# Altium PCB Sensor_Box_CAN_Switch_STM.PCBDOC
Units mil, origin at the board's own origin, x right, y up, seen from the top; angles counter-clockwise.
Board outline 1496.06 x 1407.48 mil, 2 copper layers (Top, Bot), stack 61.855 mil thick; 65 components, 48 nets, 230 pads, 95 vias.
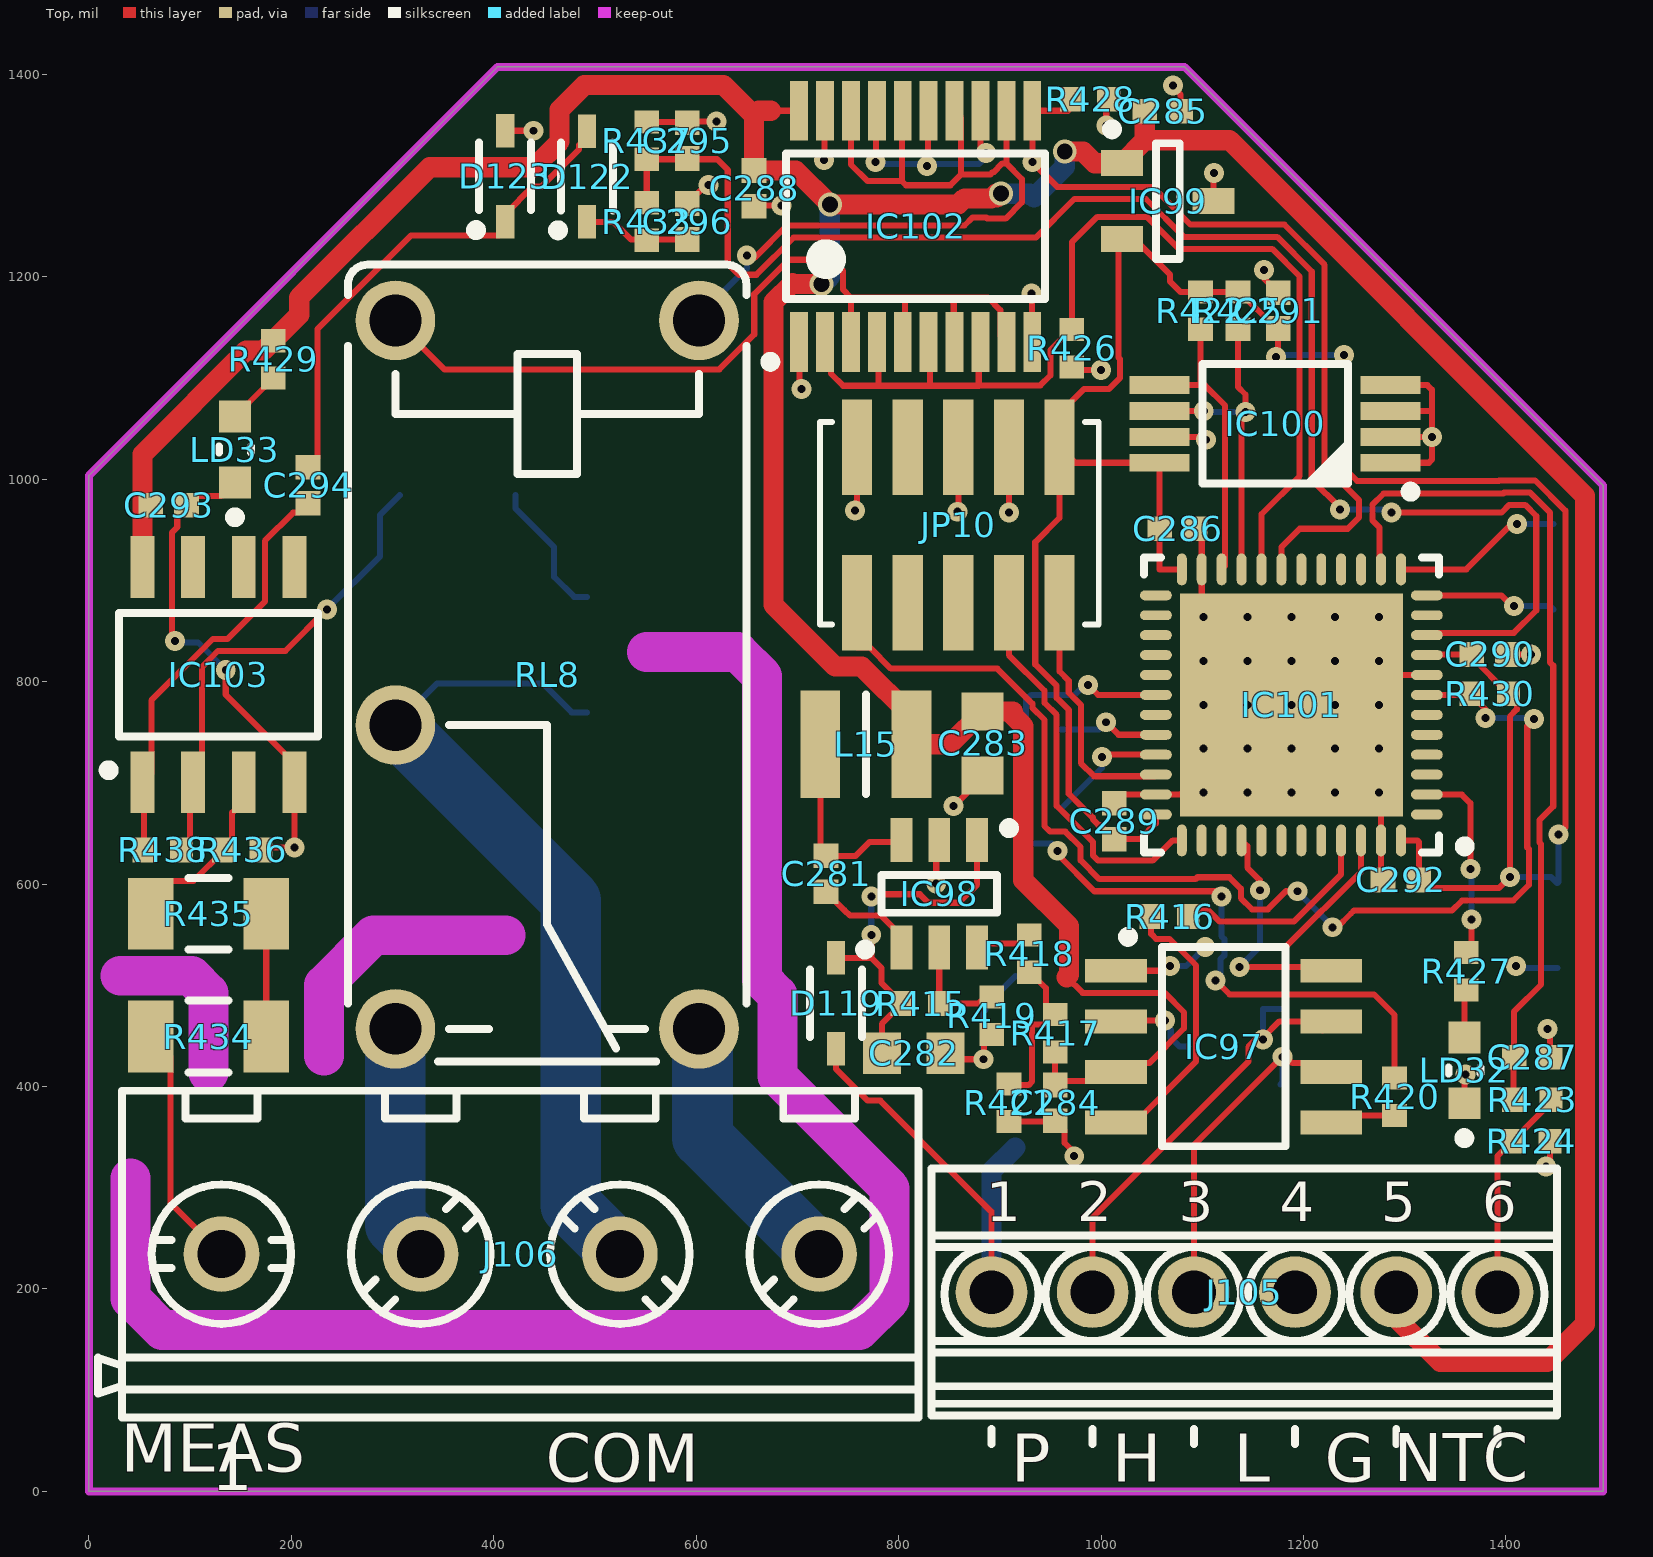
[diagram p0: Top view]
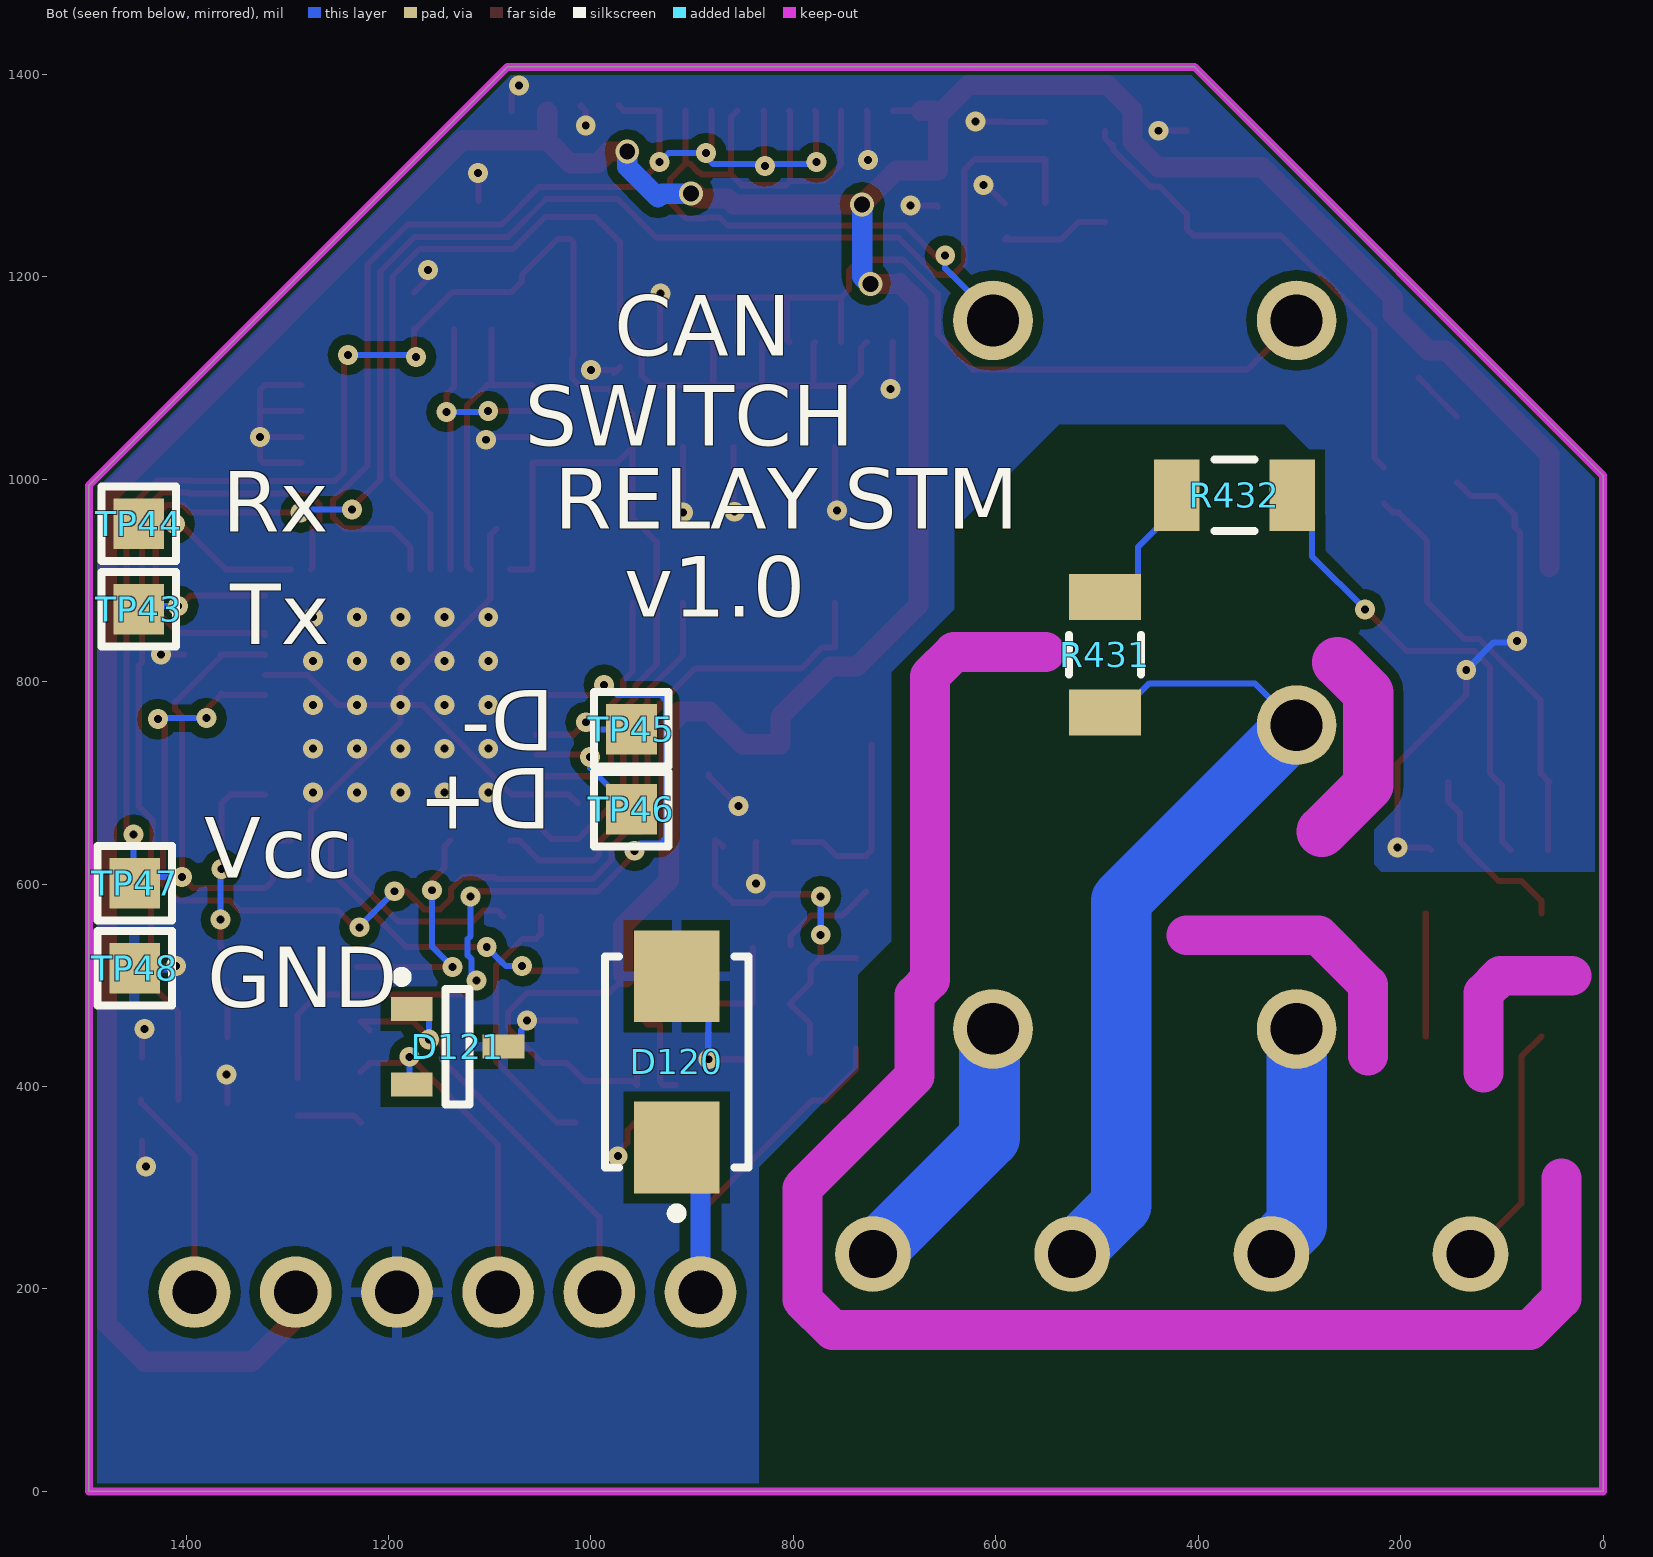
[diagram p1: Bot view, seen from below]
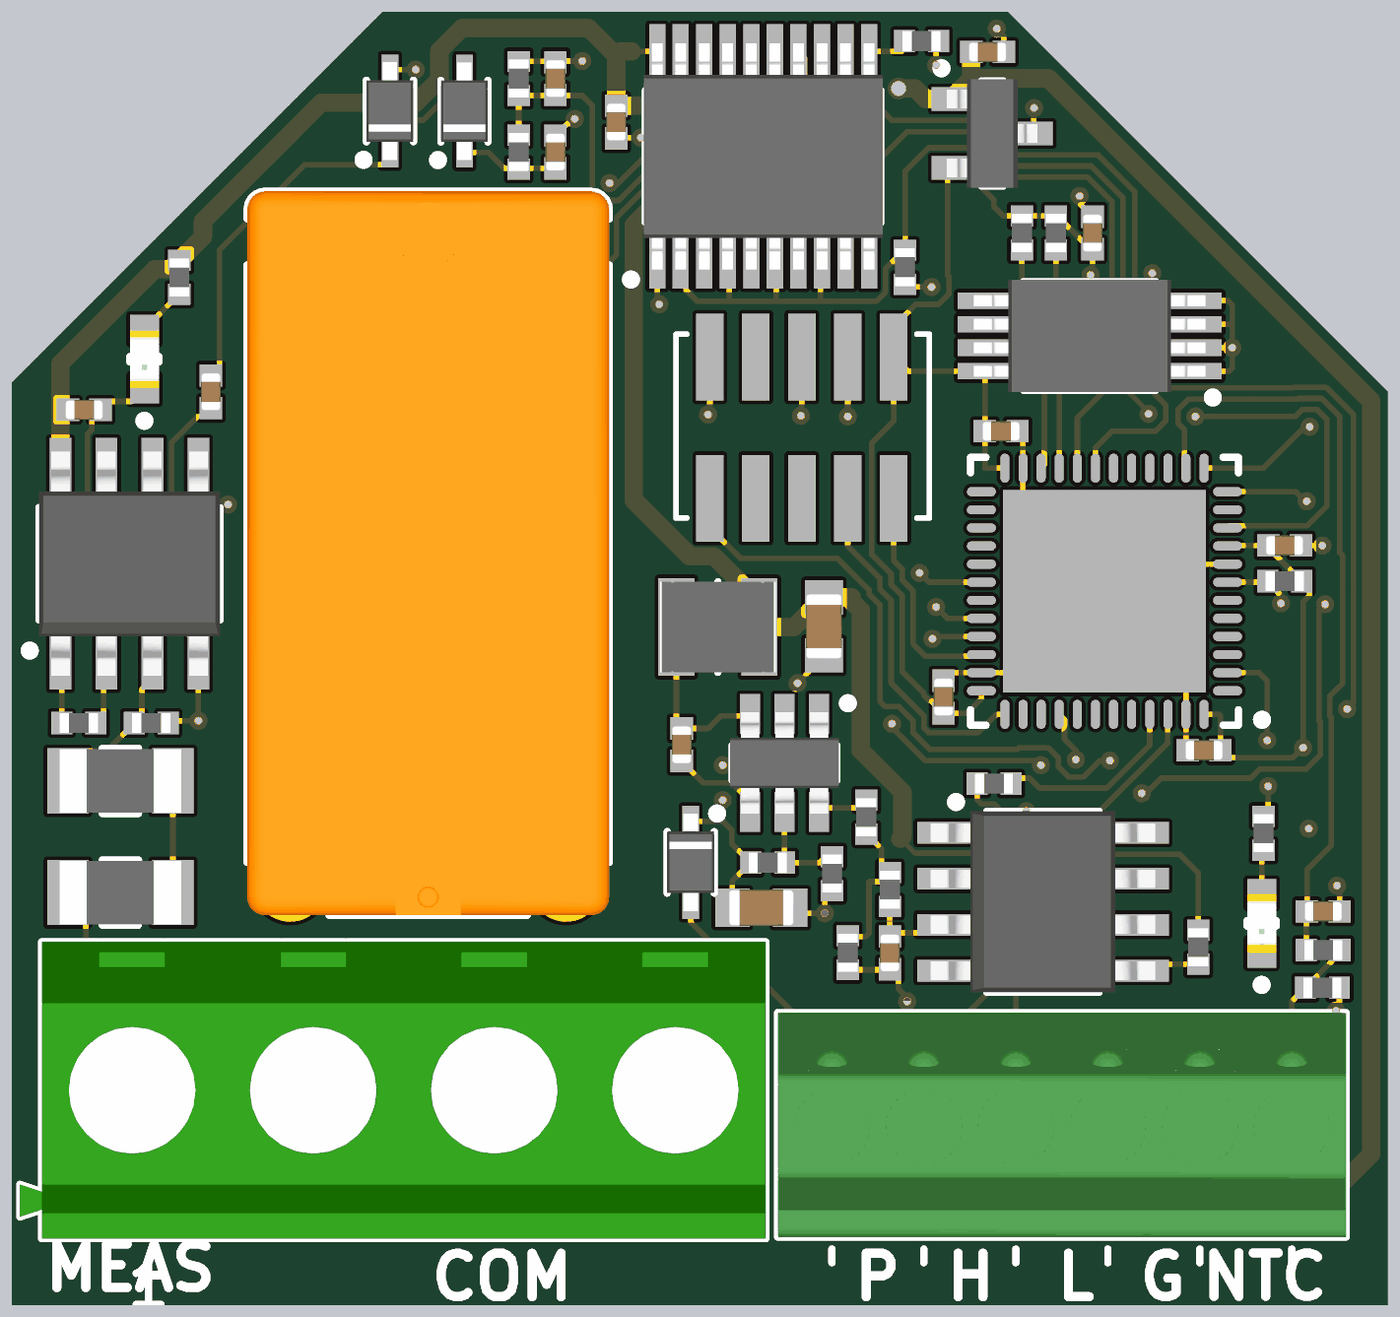
[diagram p2: 3D render of the assembled board from above, using the file's embedded part models]
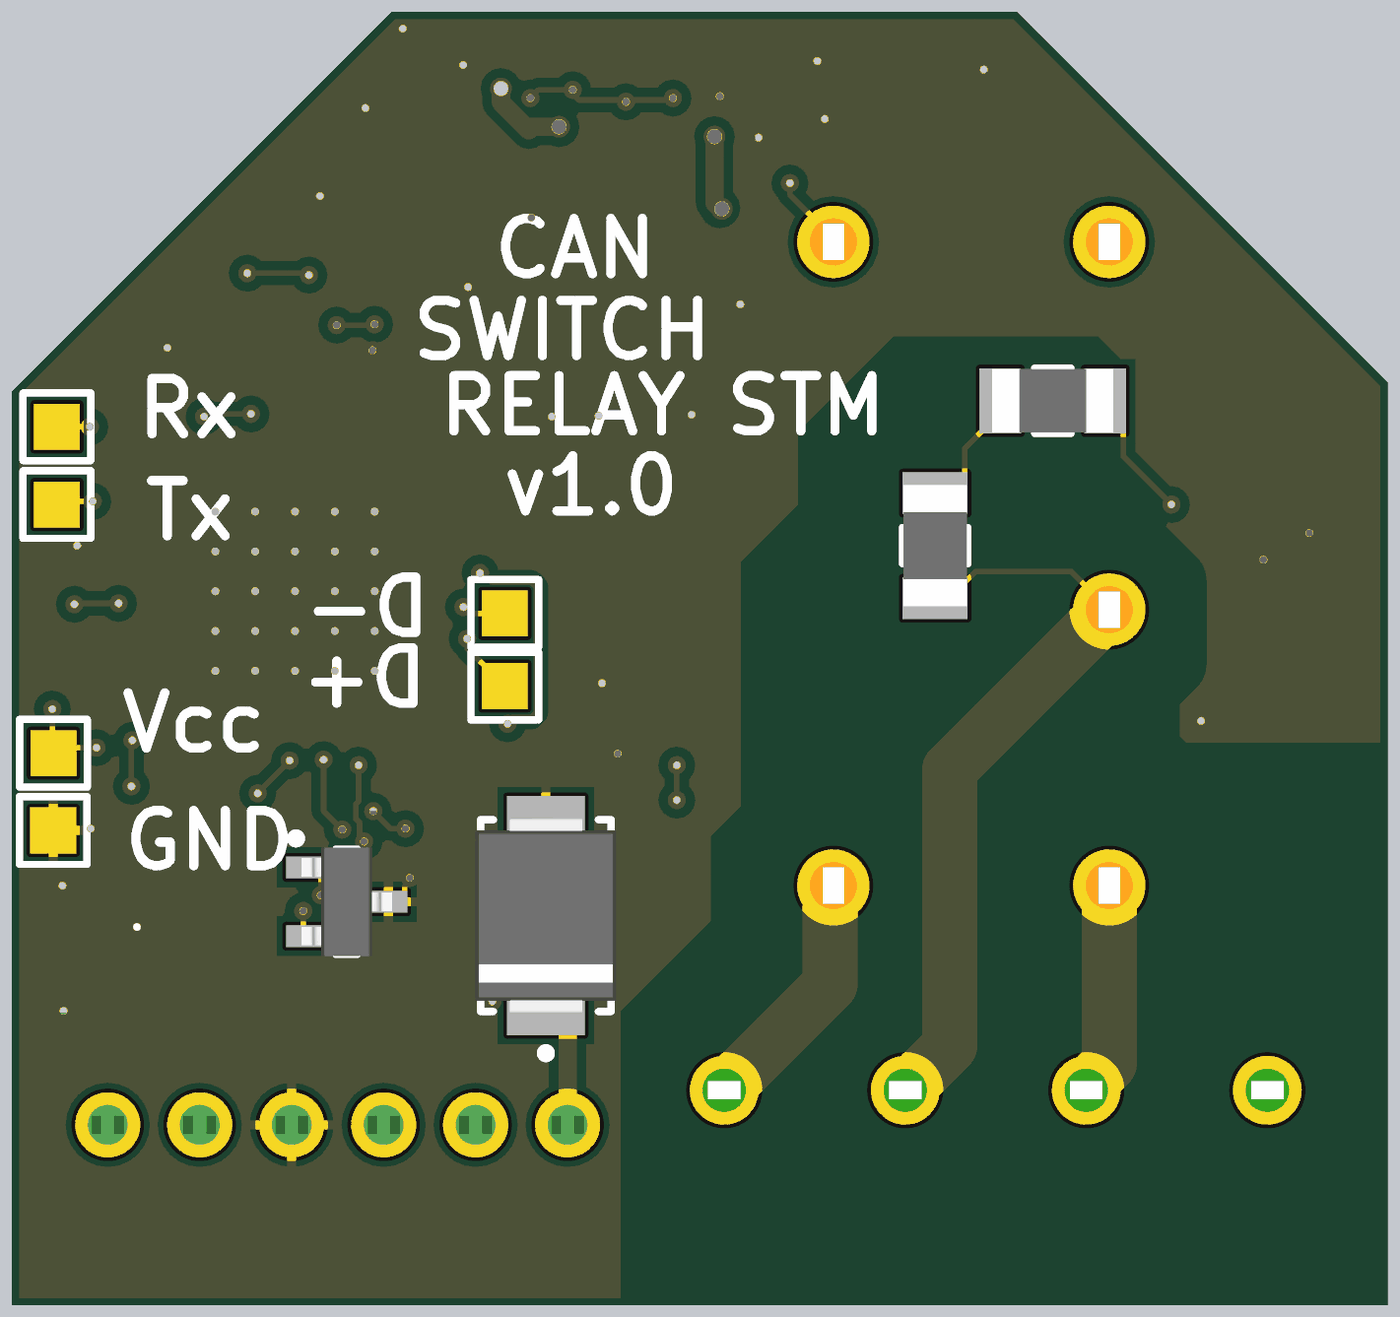
[diagram p3: 3D render of the assembled board from below, using the file's embedded part models]

## Layer stack, top to bottom
TopSolder: solder mask 0.4, Solder Resist, Dk 3.5
Top: signal copper 1.4
Dielectric1: core 59.0551, FR-4, Dk 4.8
Bot: signal copper 1.4
BottomSolder: solder mask 0.4, Solder Resist, Dk 3.5

## Board outline
0,0 0,1003.94 19.68,1023.62 403.54,1407.48 1082.68,1407.48 1496.06,994.09 1496.06,0

## Design rules (kind name [scope] priority, off if disabled: settings)
AcuteAngle [All] p1: minimum=6.00000000000000E+0001 checktracksonly=FALSE
Clearance keepout [All vs OnLayer('KeepOutLayer')] p1: gap=3.94 ignorepadtopadclearanceinfootprint=FALSE
Clearance [All] p2: gap=6 ignorepadtopadclearanceinfootprint=FALSE except(10: Arc-Poly Track-Poly SMDPad-Poly THPad-Poly Via-Poly Fill-Poly Poly-Poly)
DiffPairsRouting [All] p1: maxlimit=20 minlimit=15 mostfreqgap=17 toplayer_minwidth=15 toplayer_maxwidth=15 toplayer_prefwidth=15 bottomlayer_minwidth=15 bottomlayer_maxwidth=15 bottomlayer_prefwidth=15 maxuncoupledlength=500
HoleSize [All] p1: absolutevalues=TRUE maxlimit=200 minlimit=1 maxpercent=80.000 minpercent=20.000
MinimumSolderMaskSliver [All] p1: minsoldermaskwidth=0
MinimumSolderMaskSliver SilkscreenOverComponentPads [All] p2: minsoldermaskwidth=0
PlaneClearance [All] p1: clearance=8
PlaneConnect PlaneConnect_pad [(InPadClass('All Pads'))] p1: planeconnectstyle=Relief reliefexpansion=20 reliefentries=4 reliefconductorwidth=10 reliefairgap=10
PlaneConnect [All] p2: planeconnectstyle=Direct reliefexpansion=20 reliefentries=4 reliefconductorwidth=10 reliefairgap=10
PolygonConnect PolygonConnect_pad [(InPadClass('All Pads'))] p1: connectstyle=Relief reliefconductorwidth=10 reliefentries=4 polygonreliefangle="90 Angle" airgapwidth=10
PolygonConnect [All] p2: connectstyle=Direct reliefconductorwidth=10 reliefentries=4 polygonreliefangle="90 Angle" airgapwidth=10
RoomDefinition Sensor_Box_CAN_Switch_STM [InComponentClass('Sensor_Box_CAN_Switch_STM')] p1 off: confinementstyle=ConfineIn formatcopy=TRUE lockcomponents=FALSE outline 1344.47,-2041.35 8539.34,-2041.35 8539.34,-1106.31 1344.47,-1106.31
RoutingVias [All] p1: holewidth=7.87 width=19.68 viastyle="Through Hole" minholewidth=7.87 minwidth=19.68 maxholewidth=19.68 maxwidth=39.37
SilkToSilkClearance [All] p1: silktosilkclearance=0
SilkToSolderMaskClearance [IsPad] p1: minsilkscreentomaskgap=0 clearancetoexposedcopper=TRUE
SolderMaskExpansion [All] p1: expansion=4
ViasUnderSMD ViasUnderSMD_allow [InComponent('IC18') or InComponent('IC10') or InComponent('IC13') or InComponent('IC14') or InComponent('IC15')] p1: allowed=TRUE
ViasUnderSMD [All] p2: allowed=FALSE
Width Width_1 [(InDifferentialPairClass('All Differential Pairs'))] p1: maxlimit=8 minlimit=8 preferedwidth=8
Width [All] p2: maxlimit=100 minlimit=6 preferedwidth=6
23 further rules are at their usual default settings.

## Components (designator, comment, footprint, x,y, rotation, side; value= is the part's Value field where it differs from the comment)
C281 "1uF" CAPC1005X55N 728.35,610.24 r90 top
C282 "22uF" CAPC1709X100N 815,433 r180 top
C283 "22uF" CAPC1709X100N 883,739 r90 top
C284 "100nF" CAPC1005X55N 954.72,383.86 r90 top
C285 "1uF" CAPC1005X55N 1061,1363.58 r180 top
C286 "1uF" CAPC1005X55N 1075.72,951.14 r180 top
C287 "100nF" CAPC1005X55N 1426,429 r180 top
C288 "1uF" CAPC1005X55N 657.18,1287.45 r270 top
C289 "100nF" CAPC1005X55N 1013.1,662.14 r270 top
C290 "100nF" CAPC1005X55N 1384,827 r180 top
C291 "100nF" CAPC1005X55N 1175.05,1166.76 r270 top
C292 "100nF" CAPC1005X55N 1296.37,604.14 r0 top
C293 "1uF" CAPC1005X55N 78.74,974.41 r180 top
C294 "1uF" CAPC1005X55N 216.53,994.09 r90 top
C295 "1uF" CAPC1005X55N 591.18,1334.76 r90 top
C296 "1uF" CAPC1005X55N 591.18,1254.76 r90 top
D119 "1N4148WS" SODFL2512X100N 738.19,482.28 r270 top
D120 "SMBJ15A" DIOM5336X265N 915.35,424.41 r90 bottom
D121 "PESD1CAN-UX" SOT95P237X112-3N 1131.89,439.45 r180 bottom
D122 "1N4148WS" SODFL2512X100N 492.13,1299.21 r90 top
D123 "1N4148WS" SODFL2512X100N 411.18,1299.45 r90 top
IC97 "MCP2551-I/SN" SOIC127P600X175-8N 1121.18,439.45 r0 top
IC98 "AP65111AWU-7" SOT95P280X100-6N 840.18,590.45 r270 top
IC99 "AP7313-33SAG-7" SOT95P240X130-3N 1066,1275 r0 top
IC100 "M24256-BRDW6" SOP65P640X120-8N 1172,1054.76 r180 top
IC101 "STM32F042C6U6" STM-UFQFPN48_L 1188.1,777.14 r180 top
IC102 "SN74HCT244PW" SOP65P640X120-20N 816.93,1250 r90 top
IC103 "LM358AD" SOIC127P600X175-8N 127.95,807.09 r90 top
J105 "=Family" PHOENIX_1725698 1141.73,196.85 r0 top
J106 "=Family" TYCO_282836-4 426.18,234.45 r0 top
JP10 "PLHTD10S-TR-CV" PLHTD10S-TR-CV 734,955 r180 top
L15 "6.8uH" IND_WALSIN_WLPN3030 767.72,738.19 r0 top
LD32 "Green" LED_KINGBRIGHT_KPH-1608CGCK 1359,416 r90 top
LD33 "Green" LED_KINGBRIGHT_KPH-1608CGCK 144.18,1029.45 r90 top
R415 "13k" RESC1005X40N 822,482 r180 top
R416 "1k" RESC1005X40N 1068,568 r0 top
R417 "68k" RESC1005X40N 954.72,452.76 r270 top
R418 "68k" RESC1005X40N 929.18,531.45 r270 top
R419 "13k" RESC1005X40N 892,470 r90 top
R420 "1k" RESC1005X40N 1290,390 r90 top
R421 "13k" RESC1005X40N 909,384 r90 top
R422 "1k" RESC1005X40N 1098.32,1166.76 r90 top
R423 "10k" RESC1005X40N 1426,387 r180 top
R424 "10k" RESC1005X40N 1425,346 r180 top
R425 "1k" RESC1005X40N 1135.32,1166.76 r90 top
R426 "10k" RESC1005X40N 971.18,1129.45 r90 top
R427 "10k" RESC1005X40N 1361,514 r270 top
R428 "10k" RESC1005X40N 989.18,1375.45 r180 top
R429 "10k" RESC1005X40N 182.18,1118.45 r270 top
R430 "10k" RESC1005X40N 1384.1,788.14 r180 top
R431 "1M" RESC3216X65N 492.13,826.77 r90 bottom
R432 "1M" RESC3216X65N 364.17,984.25 r180 bottom
R433 "10k" RESC1005X40N 551.18,1254.76 r90 top
R434 "1M" RESC3216X65N 118.11,449.45 r0 top
R435 "1M" RESC3216X65N 118.11,570.87 r180 top
R436 "10k" RESC1005X40N 151.57,633.86 r0 top
R437 "10k" RESC1005X40N 551.18,1334.76 r270 top
R438 "10k" RESC1005X40N 72.83,633.86 r0 top
RL8 "REL_TYCO_PE01" REL_TYCO_PE01 452.76,807.09 r270 top value=5VDC
TP43 "Test Point" TPS127 1447,871.45 r90 bottom
TP44 "Test Point" TPS127 1447,956 r90 bottom
TP45 "Test Point" TPS127 960,753 r90 bottom
TP46 "Test Point" TPS127 960,674 r90 bottom
TP47 "Test Point" TPS127 1450.79,601 r90 bottom
TP48 "Test Point" TPS127 1451,517 r90 bottom

## Footprints (in the part's own frame and the unit in brackets; to place one, negate y for a bottom-side part, rotate by r counter-clockwise, add the part's x,y. Pads: shape width x height; smd on the part's side, far side on the other; paste and mask are expansions set on the pad)
CAPC1005X55N [mm] "Chip Capacitor, Body 1.0x0.55mm, IPC Medium Density"
  rect 0.62x0.62 smd: 1(-0.45,0) 2(0.45,0)
  body extent -0.52,-0.27 0.53,0.28, height 0.55
CAPC1709X100N [mm] "Capacitor,non-Polarized, Chip;1.65mm L X 0.85mm W X 1.00mm H, IPC Medium Density"
  rect 0.95x1.05 smd: 1(-0.8,0) 2(0.8,0)
  body extent -0.9,-0.5 0.9,0.5, height 1
DIOM5336X265N [mm] "DO-214-AA/SMB Diode, Molded Body; 5.34mm L X 3.625mm W X 2.65mm H, IPC Medium Density"
  rect 2.3x2.15 smd: 1(-2.15,0) 2(2.15,0)
  silkscreen extent -3.92,-1.8 2.65,1.8, body extent -2.7,-1.95 2.7,1.95, height 2.4
IND_WALSIN_WLPN3030 [mm] "Miniature Surface Mount Power Inductors, 3mm L X 3mm W X 1.5mm H"
  rect 1x2.7 smd: 1(-1.145,0) 2(1.145,0)
  silkscreen extent 0,-1.25 0,1.25, body extent -1.6,-1.25 1.6,1.25, height 2.3
LED_KINGBRIGHT_KPH-1608CGCK [mm] "SMT Green LED, Case 0603, Body L 1.6 x W 0.8mm H 0.65mm"
  rect 0.8x0.8 smd: 1(-0.825,0) 2(0.825,0)
  silkscreen extent -1.82,-0.4 0.08,0.4, body extent -0.8,-0.4 0.8,0.4, height 0.65
PHOENIX_1725698 [mm] "Micro PCB Terminal Block, Pitch 2.54mm, 6 Positions, Screw Connection"
  round 1.8 hole 1.1: 1(-6.35,0) 2(-3.81,0) 3(-1.27,0) 4(1.27,0) 5(3.81,0) 6(6.35,0)
  silkscreen extent -7.85,-3.81 7.85,3.1, body extent -7.85,-3.1 7.85,3.1, height 8.5
PLHTD10S-TR-CV [mm] "SMT 1.27 mm dual goldpin"
  rect 0.76x2.4 smd: 1(-5.715,-1.95) 2(-5.715,1.95) 3(-4.445,-1.95) 4(-4.445,1.95) 5(-3.175,-1.95) 6(-3.175,1.95) 7(-1.905,-1.95) 8(-1.905,1.95) 9(-0.635,-1.95) 10(-0.635,1.95)
  silkscreen extent -6.7,-2.58 0.3,2.5, body extent -6.5,-2.15 0.1,2.15, height 4.5
REL_TYCO_PE01 [mm] "1 form C (CO) General Purpose Low Power PCB Relay, PE Series, Body 20mm x 10mm"
  round 2 hole 1.3: 11(1.27,-3.81) 12(8.89,3.81) 14(8.89,-3.81) A1(-8.89,-3.81) A2(-8.89,3.81)
  silkscreen extent -10.29,-5 9.71,5, body extent -10.29,-5 9.71,5, height 10
RESC1005X40N [mm] "Chip Resistor, EIA 0402, Metric 1005, Body 1.0x0.5mm, IPC Medium Density"
  rect 0.58x0.62 smd: 1(-0.47,0) 2(0.47,0)
  body extent -0.52,-0.27 0.53,0.28, height 0.4
RESC3216X65N [mm] "Chip Resistor, EIA 1206, Metric 3216, Body 3.2x1.6mm, IPC Medium Density"
  rect 1.15x1.8 smd: 1(-1.45,0) 2(1.45,0)
  silkscreen extent -0.5,-0.9 0.5,0.9, body extent -1.67,-0.87 1.68,0.88, height 0.65
SODFL2512X100N [mm] "SODFL Diode; 1.70mm W X 1.25mm L X 1.00mm H body, IPC Medium Density"
  rect 0.84x0.46 smd: 1(-1.14,0) 2(1.14,0)
  silkscreen extent -1.47,-0.65 0.85,0.86, body extent -1.35,-0.65 1.35,0.65, height 1
SOIC127P600X175-8N [mm] "SOIC 8, Pitch 1.27mm - Body 4x5mm, IPC Medium Density"
  rect 1.55x0.6 smd: 1(-2.7,1.905) 2(-2.7,0.635) 3(-2.7,-0.635) 4(-2.7,-1.905) 5(2.7,-1.905) 6(2.7,-0.635) 7(2.7,0.635) 8(2.7,1.905)
  silkscreen extent -2.52,-2.5 1.55,2.88, body extent -3.1,-2.5 3.1,2.5, height 1.75
SOP65P640X120-8N [mm] "SOP, 0.65mm pitch; 8 pin, 4.40mm W X 3.00mm L X 1.20mm H body, IPC Medium Density"
  rect 1.5x0.45 smd: 1(-2.9,0.975) 2(-2.9,0.325) 3(-2.9,-0.325) 4(-2.9,-0.975) 5(2.9,-0.975) 6(2.9,-0.325) 7(2.9,0.325) 8(2.9,0.975)
  silkscreen extent -3.53,-1.5 1.83,1.82, body extent -3.2,-1.55 3.2,1.55, height 1.2
SOP65P640X120-20N [mm] "SOP, 20-Leads, Body 6.5x4.4mm, Pitch 0.65mm, IPC Medium Density"
  rect 1.5x0.45 smd: 1(-2.9,2.925) 2(-2.9,2.275) 3(-2.9,1.625) 4(-2.9,0.975) 5(-2.9,0.325) 6(-2.9,-0.325) 7(-2.9,-0.975) 8(-2.9,-1.625) 9(-2.9,-2.275) 10(-2.9,-2.925) 11(2.9,-2.925) 12(2.9,-2.275) 13(2.9,-1.625) 14(2.9,-0.975) 15(2.9,-0.325) 16(2.9,0.325) 17(2.9,0.975) 18(2.9,1.625) 19(2.9,2.275) 20(2.9,2.925)
  silkscreen extent -3.52,-3.25 1.82,3.77, body extent -3.12,-3.3 3.12,3.3, height 1.2
SOT95P237X112-3N [mm] "SOT, 0.95mm, pitch; 3 pin,1.30mm W X 2.92mm L X 1.12mm H body, IPC Medium Density"
  rect 1.05x0.6 smd: 1(-1.15,0.95) 2(-1.15,-0.95) 3(1.15,0)
  silkscreen extent -1.53,-1.45 0.3,1.87, body extent -1.25,-1.5 1.25,1.5, height 1.1
SOT95P240X130-3N [mm] "SOT23 3-Leads, Pitch 0.95mm - Body 1.3x2.9mm, IPC Medium Density"
  rect 1.05x0.65 smd: 1(-1.15,0.95) 2(-1.15,-0.95) 3(1.15,0)
  silkscreen extent -1.52,-1.45 0.3,1.92, body extent -1.25,-1.5 1.25,1.5, height 1.3
SOT95P280X100-6N [mm] "SOT23, 0.95mm pitch; 6 pin, 1.625mm W X 2.90mm L X 1.00mm H body, IPC Medium Density"
  rect 1.1x0.55 smd: 1(-1.35,0.95) 2(-1.35,0) 3(-1.35,-0.95) 4(1.35,-0.95) 5(1.35,0) 6(1.35,0.95)
  silkscreen extent -1.77,-1.45 0.48,1.88, body extent -1.4,-1.5 1.4,1.5, height 1
STM-UFQFPN48_L [mm] "QFN, 48-Leads, Body 7.1x7.1mm, Pitch 0.5mm, Thermal Pad 5.6x5.6mm, IPC High Density"
  oval 0.8x0.25 smd: 1(-3.4,2.75) 2(-3.4,2.25) 3(-3.4,1.75) 4(-3.4,1.25) 5(-3.4,0.75) 6(-3.4,0.25) 7(-3.4,-0.25) 8(-3.4,-0.75) 9(-3.4,-1.25) 10(-3.4,-1.75) 11(-3.4,-2.25) 12(-3.4,-2.75) 25(3.4,-2.75) 26(3.4,-2.25) 27(3.4,-1.75) 28(3.4,-1.25) 29(3.4,-0.75) 30(3.4,-0.25) 31(3.4,0.25) 32(3.4,0.75) 33(3.4,1.25) 34(3.4,1.75) 35(3.4,2.25) 36(3.4,2.75)
  oval 0.25x0.8 smd: 13(-2.75,-3.4) 14(-2.25,-3.4) 15(-1.75,-3.4) 16(-1.25,-3.4) 17(-0.75,-3.4) 18(-0.25,-3.4) 19(0.25,-3.4) 20(0.75,-3.4) 21(1.25,-3.4) 22(1.75,-3.4) 23(2.25,-3.4) 24(2.75,-3.4) 37(2.75,3.4) 38(2.25,3.4) 39(1.75,3.4) 40(1.25,3.4) 41(0.75,3.4) 42(0.25,3.4) 43(-0.25,3.4) 44(-0.75,3.4) 45(-1.25,3.4) 46(-1.75,3.4) 47(-2.25,3.4) 48(-2.75,3.4)
  rect 5.6x5.6 smd: 49(0,0)
  silkscreen extent -4.48,-3.7 3.7,3.7, body extent -3.55,-3.55 3.55,3.55, height 0.6
TPS127 [mil] "1.27 x  1.27mm SMD Test Point Area"
  rect 50x50 smd paste-50: 1(0,0)
  silkscreen extent -37,-37 37,37
TYCO_282836-4 [mm] "15.5A, 300V, Terminal Block, Pitch 5mm, 4 Positions, Screw Connection"
  round 1.9 hole 1.2: 1(-7.5,0) 2(-2.5,0) 3(2.5,0) 4(7.5,0)
  silkscreen extent -10.6,-4.1 10,4.1, body extent -10.6,-4.1 10,4.1, height 10

## Part data
C281 C285 C286 C288 C293 C294 C295 C296: library part CC0402_1UF_16V_10%_X5R, "Non-polarised capacitor", Case=0402, Manufacturer=GENERIC, Manufacturer1 ComponentHeight=0.55mm, Manufacturer1 Example=TDK, Manufacturer1 Part Number=C1005X5R1C105KT, Tolerance=±10%, Voltage=16V, Author="CERN DEM JLC", Component Type=Standard, CreateDate=25.10.2012, HelpURL=\\cern.ch\dfs\Applications\Altium\Datasheets\CC0402_X5R_TDK_C.pdf, LatestRevisionDate=25.10.2012, Manufacturer Part Number=CC0402_1UF_16V_10%_X5R, Mounted=Yes, Part Description="SMD Multilayer Chip Ceramic Capacitor", Part Number=CC0402_1UF_16V_10%_X5R, Pin Count=2, Sense=No, SMD=Yes, Socket=No, Status=Preferred, TC=X5R
C282 C283: library part CC0603_22UF_6.3V_20%_X5R, "Non-polarised capacitor", Case=0603, Manufacturer=GENERIC, Manufacturer1 ComponentHeight=1mm, Manufacturer1 Example=TDK, Manufacturer1 Part Number=C1608X5R0J226M080AC, Tolerance=±20%, Voltage=6.3V, Author="CERN DEM JLC", Component Type=Standard, CreateDate=16.12.2013, HelpURL=\\cern.ch\dfs\Applications\Altium\Datasheets\CC0603_X5R_TDK_C.pdf, LatestRevisionDate=13.09.2016, Manufacturer Part Number=CC0603_22UF_6.3V_20%_X5R, Mounted=Yes, Part Description="SMD Multilayer Chip Ceramic Capacitor", Part Number=CC0603_22UF_6.3V_20%_X5R, Pin Count=2, Sense=No, SMD=Yes, Socket=No, Status=None, TC=X5R
C284 C287 C289 C290 C291 C292: library part CC0402_100NF_16V_10%_X5R, "Non-polarised capacitor", Case=0402, Manufacturer=GENERIC, Manufacturer1 ComponentHeight=0.55mm, Manufacturer1 Example=MURATA, Manufacturer1 Part Number=GRM155R61C104KA88D, Tolerance=±10%, Voltage=16V, Author="CERN DEM JLC", Component Type=Standard, CreateDate=10.12.2013, HelpURL=\\cern.ch\dfs\Applications\Altium\Datasheets\CC0402_X5R_MURATA_GRM.pdf, LatestRevisionDate=10.12.2013, Manufacturer Part Number=CC0402_100NF_16V_10%_X5R, Mounted=Yes, Part Description="SMD Multilayer Chip Ceramic Capacitor", Part Number=CC0402_100NF_16V_10%_X5R, Pin Count=2, Sense=No, SMD=Yes, Socket=No, Status=None, TC=X5R
D119 D122 D123: "Diode", Case=SOD-323F, Manufacturer="FAIRCHILD SEMICONDUCTOR", Power=150mA, Voltage=75V, Author="CERN DEM JLC", Bonding=No, ComponentHeight=1mm, Component Type=Standard, CreateDate=12.05.2011, Device=1N4148WS, HelpURL=\\cern.ch\dfs\Applications\Altium\Datasheets\1N4148WS.pdf, LatestRevisionDate=12.05.2011, Manufacturer Part Number=1N4148WS, Mounted=Yes, PackageDescription="SODFL Diode; 1.70mm W X 1.25mm L X 1.00mm H body, IPC Medium Density", Part Description="Small Signal Diodes", Part Number=1N4148WS, Pin Count=2, PressFit=No, Sense=No, SMD=Yes, Socket=No
D120: "Zener Diode", Case=DO-214AA, Manufacturer="FAIRCHILD SEMICONDUCTOR", Power=600W, Voltage=15V, Author="CERN DEM JLC", Bonding=No, ComponentHeight=2.65mm, Component Type=Standard, CreateDate=08.12.2008, Device=SMBJ15A, HelpURL=\\cern.ch\dfs\Applications\Altium\Datasheets\SMBJ.pdf, LatestRevisionDate=19.12.2011, Manufacturer Part Number=SMBJ15A, Mounted=Yes, PackageDescription="DO-214-AA/SMB Diode, Molded Body; 5.34mm L X 3.625mm W X 2.65mm H, IPC Medium Density", Part Description="Uni-Directional Transient Voltage Suppressor Diode", Part Number=SMBJ15A, Pin Count=2, PressFit=No, Sense=No, SMD=Yes, Socket=No
D121: "TVS Diode for CAN", Case=SOT-23, Manufacturer=Nexperia, Power=400W, Voltage=24V, Author="CERN DEM JLC", Bonding=No, ComponentHeight=1.12mm, Component Type=Standard, CreateDate=03.09.2014, Device=PESD1CAN-UX, HelpURL=\\cern.ch\dfs\Applications\Altium\Datasheets\SM712.TCT.pdf, LatestRevisionDate=13.01.2015, Manufacturer Part Number=PESD1CAN-UX, Mounted=Yes, PackageDescription="SOT, 0.95mm, pitch; 3 pin,1.30mm W X 2.92mm L X 1.12mm H body, IPC Medium Density", Part Description="TVS Diode for CAN", Part Number=PESD1CAN-UX, Pin Count=3, PressFit=No, Sense=No, SMD=Yes, Socket=No
IC97: "High-Speed CAN Transceiver, 8-Pin SOIC, Industrial Temperature", Case=SOIC8, Manufacturer="MICROCHIP TECHNOLOGY", Author=GK, Bonding=No, ComponentHeight=1.75mm, Component Type=Standard, CreateDate=07.09.2016, Device=MCP2551-I/SN, LatestRevisionDate=07.09.2016, Manufacturer Part Number=MCP2551-I/SN, Mounted=Yes, PackageDescription="SOIC 8, Pitch 1.27mm - Body 4x5mm, IPC Medium Density", Part Description="High-Speed CAN Transceiver", Part Number=MCP2551-I/SN, Pin Count=8, PressFit=No, Sense=No, SMD=Yes, Socket=No
IC98: "Light Load Improved 1.5A Synch DC/DC Buck Converter", Case=SOT23-6, Manufacturer="DIODES INCORPORATED", Author="CERN DEM JLC", Bonding=No, ComponentHeight=1.1mm, Component Type=Standard, CreateDate=20.03.2018, Device=AP65111AWU-7, HelpURL=\\cern.ch\dfs\Applications\Altium\Datasheets\AP65111AWU-7.pdf, LatestRevisionDate=20.03.2018, Manufacturer Part Number=AP65111AWU-7, Mounted=Yes, PackageDescription="SOT23, 0.95mm pitch; 6 pin, 1.625mm W X 2.90mm L X 1.00mm H body, IPC Medium Density", Part Description="Light Load Improved 1.5A Synch DC/DC Buck Converter", Part Number=AP65111AWU-7, Pin Count=6, PressFit=No, Sense=No, SMD=Yes, Socket=No
IC99: "3-Terminal Regulator 1=IN 2=OUT 3=GND", Case=SOT23, Manufacturer="DIODES INCORPORATED", Author="CERN DEM JLC", Bonding=No, ComponentHeight=1.35mm, Component Type=Standard, CreateDate=20.03.2018, Device=AP7313-33SAG-7, HelpURL=\\cern.ch\dfs\Applications\Altium\Datasheets\AP7313-33SAG-7.pdf, LatestRevisionDate=20.03.2018, Manufacturer Part Number=AP7313-33SAG-7, Mounted=Yes, PackageDescription="SOT23 3-Leads, Pitch 0.95mm - Body 1.3x2.9mm, IPC Medium Density", Part Description="3.3V, 150mA Low Quiescent Current, Fast Transient Low Dropout Linear Regulator", Part Number=AP7313-33SAG-7, Pin Count=3, PressFit=No, Sense=No, SMD=Yes, Socket=No
IC100: "256-Kbit Serial I²C Bus EEPROM", Case=TSSOP8, Manufacturer="ST MICROELECTRONICS", Part Number=M24256-BRDW6P, Author="CERN DEM MR", Bonding=No, ComponentHeight=1.2mm, Component Type=Standard, CreateDate=17.03.2016, Device=M24256-BRDW6, HelpURL=\\cern.ch\dfs\Applications\Altium\Datasheets\M24256-BRDW6P.pdf, LatestRevisionDate=17.03.2016, Manufacturer Part Number=M24256-BRDW6, Mounted=Yes, PackageDescription="SOP, 0.65mm pitch; 8 pin, 4.40mm W X 3.00mm L X 1.20mm H body, IPC Medium Density", Part Description="256-Kbit Serial I²C Bus EEPROM", Pin Count=8, PressFit=No, Sense=No, SMD=Yes, Socket=No
IC101: library part CMP-0304-00104-1, "ARM Cortex-M0 32-bit MCU, 32 KB Flash, 6 KB Internal RAM, 38 I/Os, 48-Pin UFQFPN, -40 to 85 degC, Tray", I/Os (High Current)=38, Operating Frequency(F) (Processor speed) (MHz)=48, Package Description="48-Pin Ultra Thin Fine Pitch Quad Flat No-Lead, 7 x 7 x 0.6 mm Body, 0.5 mm Pitch, Exposed Pad", Package Reference=UFQFPN48, Supply Voltage(Vcc) min (V)=2, ComponentLink1Description="Manufacturer URL", ComponentLink1URL=http://www.st.com/, ComponentLink2Description=Datasheet, ComponentLink2URL=http://www.st.com/st-web-ui/static/active/en/resource/technical/document/datasheet/DM00105814.pdf, Core="ARM Cortex-M0", DatasheetVersion="Rev. 5", FLASH Size (Prog) (kB)=32, Internal RAM Size (kB)=6, Mounting Technology="Surface Mount", Packing=Tray
IC102: "Octal Buffer/Driver with 3-State Ouputs", Case=TSSOP20, Manufacturer="TEXAS INSTRUMENTS", Author="CERN DEM JLC", Bonding=No, ComponentHeight=1.2mm, Component Type=Standard, CreateDate=11.10.2011, Device=SN74HCT244PW, HelpURL=\\cern.ch\dfs\Applications\Altium\Datasheets\SN74HCT244PW.pdf, LatestRevisionDate=11.10.2011, Manufacturer Part Number=SN74HCT244PW, Mounted=Yes, PackageDescription="SOP, 20-Leads, Body 6.5x4.4mm, Pitch 0.65mm, IPC Medium Density", Part Description="Octal Buffer And Line Driver with 3-State Ouputs", Part Number=SN74HCT244PW, Pin Count=20, PressFit=No, Sense=No, SMD=Yes, Socket=No
IC103: "Dual Operational Amplifier", Case=SOIC8, Manufacturer="TEXAS INSTRUMENTS", Author="CERN DEM JLC", Bonding=No, ComponentHeight=1.75mm, Component Type=Standard, CreateDate=02.12.2008, Device=LM358AD, HelpURL=\\cern.ch\dfs\Applications\Altium\Datasheets\LM358AD.pdf, LatestRevisionDate=13.04.2010, Manufacturer Part Number=LM358AD, Mounted=Yes, PackageDescription="SOIC 8, Pitch 1.27mm - Body 4x5mm, IPC Medium Density", Part Description="Dual Operational Amplifier", Part Number=LM358AD, Pin Count=8, PressFit=No, Sense=No, SMD=Yes, Socket=No
J105: library part PHOENIX_1725698, "Terminal Block, 6 Positions, Screw Connection", Manufacturer="PHOENIX CONTACT", Manufacturer Part Number="1725698 (MPT 0,5/6-2,54)", Author="CERN DEM JMW", ComponentHeight=8.5mm, Component Type=Standard, CreateDate=07.11.2008, HelpURL=\\cern.ch\dfs\Applications\Altium\Datasheets\PHOENIX_1725698.pdf, LatestRevisionDate=26.04.2010, Mounted=Yes, Part Description="6A, 63V, Terminal Block, Pitch 2.54mm, 6 Positions, Screw Connection", Part Number=PHOENIX_1725698, Pin Count=6, PressFit=No, Sense=No, SMD=No, Socket=No, Status=None
J106: library part TYCO_282836-4, "Terminal Block, 4 Positions, Screw Connection", Manufacturer="TYCO ELECTRONICS", Manufacturer Part Number=282836-4, Author="CERN DEM JLC", ComponentHeight=10mm, Component Type=Standard, CreateDate=10.11.2014, HelpURL=\\cern.ch\dfs\Applications\Altium\Datasheets\TYCO_282836-4.pdf, LatestRevisionDate=10.11.2014, Mounted=Yes, Part Description="15.5A, 300V, Terminal Block, Pitch 5mm, 4 Positions, Screw Connection", Part Number=TYCO_282836-4, Pin Count=4, PressFit=No, Sense=No, SMD=No, Socket=No, Status=None
JP10: library part "CON_2x5 1.27 SMT Male", "1.27 mm dual row goldpin (Maritex)"
L15: "6,8uH; 900mA; 0,211O; 3x3x1,5mm", Manufacturer=WALSIN, Manufacturer Part Number=WLPN303015M6R8PB, Part Number=IND_6.8UH_20%_WALSIN_WLPN303015M6R8PB, Power=900mA, Resistance=0.21R, Tolerance=±20%, Author=GK, ComponentHeight=1.5, Component Type=Standard, CreateDate=11.07.2016, HelpURL=\\cern.ch\dfs\Applications\Altium\Datasheets\IND_MURATA-PS_8200.pdf, LatestRevisionDate=11.07.2016, Mounted=Yes, Part Description="Miniature Surface Mount Power Inductor (8200 Series)", Pin Count=2, Sense=No, SMD=Yes, Socket=No, Status=None
LD32 LD33: library part LED_KINGBRIGHT_KPH-1608CGCK, "LED Green 1C 2A", Manufacturer=KINGBRIGHT, Manufacturer Part Number=KPH-1608CGCK, Author="CERN DEM JLC", Bonding=No, Color=Green, ComponentHeight=0.65mm, Component Type=Standard, CreateDate=03.07.2017, HelpURL=\\cern.ch\dfs\Applications\Altium\Datasheets\LED_KINGBRIGHT_KPH-1608CGCK.pdf, LatestRevisionDate=03.07.2017, Mounted=Yes, PackageDescription="SMT Green LED, Case 0603, Body L 1.6 x W 0.8mm H 0.65mm", Part Description="SMD Green LED, Case 1.6mmX0.8mm(0603), 0.65mm Thickness", Part Number=LED_KINGBRIGHT_KPH-1608CGCK, Pin Count=2, PressFit=No, Sense=No, SMD=Yes, Socket=No
R415 R419 R421: library part R0402_13K_1%_0.0625W_100PPM, "Resistor - 1%", Case=0402, Manufacturer=GENERIC, Manufacturer1 ComponentHeight=0.4mm, Manufacturer1 Example="YAGEO PHYCOMP", Manufacturer1 Part Number=232270671303L, Power=0.0625W, Tolerance=±1%, Author="CERN DEM JLC", Component Type=Standard, CreateDate=03.12.2007, HelpURL=\\cern.ch\dfs\Applications\Altium\Datasheets\R0402_Phycomp_RC0402.pdf, LatestRevisionDate=17.10.2012, Manufacturer Part Number=R0402_13K_1%_0.0625W_100PPM, Mounted=Yes, Part Description="General Purpose Thick Film Chip Resistor", Part Number=R0402_13K_1%_0.0625W_100PPM, Pin Count=2, PressFit=No, Sense=No, SMD=Yes, Socket=No, Status="Not Recommended", TC=±100ppm/°C
R416 R420 R422 R425: library part R0402_1K_1%_0.0625W_100PPM, "Resistor - 1%", Case=0402, Manufacturer=GENERIC, Manufacturer1 ComponentHeight=0.4mm, Manufacturer1 Example="YAGEO PHYCOMP", Manufacturer1 Part Number=232270671002L, Power=0.0625W, Tolerance=±1%, Author="CERN DEM JLC", Component Type=Standard, CreateDate=03.12.2007, HelpURL=\\cern.ch\dfs\Applications\Altium\Datasheets\R0402_Phycomp_RC0402.pdf, LatestRevisionDate=17.10.2012, Manufacturer Part Number=R0402_1K_1%_0.0625W_100PPM, Mounted=Yes, Part Description="General Purpose Thick Film Chip Resistor", Part Number=R0402_1K_1%_0.0625W_100PPM, Pin Count=2, PressFit=No, Sense=No, SMD=Yes, Socket=No, Status="Not Recommended", TC=±100ppm/°C
R417 R418: library part R0402_68K_1%_0.0625W_100PPM, "Resistor - 1%", Case=0402, Manufacturer=GENERIC, Manufacturer1 ComponentHeight=0.4mm, Manufacturer1 Example="YAGEO PHYCOMP", Manufacturer1 Part Number=232270676803L, Power=0.0625W, Tolerance=±1%, Author="CERN DEM JLC", Component Type=Standard, CreateDate=03.12.2007, HelpURL=\\cern.ch\dfs\Applications\Altium\Datasheets\R0402_Phycomp_RC0402.pdf, LatestRevisionDate=17.10.2012, Manufacturer Part Number=R0402_68K_1%_0.0625W_100PPM, Mounted=Yes, Part Description="General Purpose Thick Film Chip Resistor", Part Number=R0402_68K_1%_0.0625W_100PPM, Pin Count=2, PressFit=No, Sense=No, SMD=Yes, Socket=No, Status="Not Recommended", TC=±100ppm/°C
R423 R424 R426 R427 R428 R429 R430 R433 R436 R437 R438: library part R0402_10K_1%_0.0625W_100PPM, "Resistor - 1%", Case=0402, Manufacturer=GENERIC, Manufacturer1 ComponentHeight=0.4mm, Manufacturer1 Example="YAGEO PHYCOMP", Manufacturer1 Part Number=232270671003L, Power=0.0625W, Tolerance=±1%, Author="CERN DEM JLC", Component Type=Standard, HelpURL=\\cern.ch\dfs\Applications\Altium\Datasheets\R0402_Phycomp_RC0402.pdf, Manufacturer Part Number=R0402_10K_1%_0.0625W_100PPM, Mounted=Yes, Part Description="General Purpose Thick Film Chip Resistor", Part Number=R0402_10K_1%_0.0625W_100PPM, Pin Count=2, SMD=Yes, Socket=No, TC=±100ppm/°C
  R423 R424 R426 R427 R428 R429 R430: CreateDate=03.12.2007, LatestRevisionDate=17.10.2012, PressFit=No, Sense=No, Status="Not Recommended"
  R433 R436 R437 R438: CreateDate=2007-12-03, LatestRevisionDate=2012-10-17, Status="Not recommended", Table="Resistors SMD"
R431 R432 R434 R435: library part R1206_1M_1%_0.25W_100PPM, "Resistor - 1%", Case=1206, Manufacturer=GENERIC, Manufacturer1 ComponentHeight=0.65mm, Manufacturer1 Example="NIC COMPONENT", Manufacturer1 Part Number=NRC12F1004TRF, Power=0.25W, Tolerance=±1%, Author="CERN DEM JLC", Component Type=Standard, CreateDate=03.12.2007, HelpURL=\\cern.ch\dfs\Applications\Altium\Datasheets\R1206_NIC_NRC.pdf, LatestRevisionDate=13.03.2008, Manufacturer Part Number=R1206_1M_1%_0.25W_100PPM, Mounted=Yes, Part Description="General Purpose Thick Film Chip Resistor", Part Number=R1206_1M_1%_0.25W_100PPM, Pin Count=2, PressFit=No, Sense=No, SMD=Yes, Socket=No, Status=Preferred, TC=±100ppm/°C
RL8: library part REL_TYCO_PE014F05, "1 form C (CO) General Purpose Low Power PCB Relay, PE Series", Manufacturer="TYCO SCHRACK", Manufacturer Part Number="PE014F05 or 1-1415390-1", Author="CERN DEM JLC", ComponentHeight=10mm, Component Type=Standard, CreateDate=20.03.2018, HelpURL=\\cern.ch\dfs\Applications\Altium\Datasheets\REL_TYCO_PE014F05.pdf, LatestRevisionDate=20.03.2018, Mounted=Yes, PackageDescription="1 form C (CO) General Purpose Low Power PCB Relay, PE Series, Body 20mm x 10mm", Part Description="5A/250VAC 1 form C (CO) General Purpose Low Power PCB Relay, PE Series", Part Number=REL_TYCO_PE014F05, Pin Count=5, PressFit=No, Sense=No, SMD=No, Socket=No, Status=None
TP43 TP44 TP45 TP46 TP47 TP48: library part SMD_PAD_1.27X1.27MM, Author="CERN DEM JLC", ComponentHeight=0mm, Component Type="Standard (No BOM)", CreateDate=12.01.2008, Family="Test Point", HelpURL=Undefined, LatestRevisionDate=12.01.2008, Mounted=No, PackageDescription="1.27mm x 1.27mm PCB Copper Area (SMD Test Point)", Part Description="1.27mm x 1.27mm PCB Copper Area (SMD Test Point)", Part Number=SMD_PAD_1.27X1.27MM, Pin Count=1, Sense=No, SMD=Yes, Socket=No, Status=None

## Via types
v1: diameter 19.68, hole 7.87, Top to Bot, tented both sides, 91 vias
v2: diameter 23.62, hole 15.75, Top to Bot, tented both sides, 4 vias

## Nets (pads, with @x,y where several pads share a name; then routed paths per layer and width w, separated by ;. In a path a pad name is that pad's centre, name@x,y a point inside that pad or via, vN(x,y) a via of type N, cw(c..) or ccw(c..) an arc to the next point about the centre after c; other vN are vias at no path point)
AC_MEAS: C295.1 IC101.10 R433.2 R437.2 | length 1527.8
  Top w6: R433.2 R437.2 C295.1@590.39,1316.26 ; v1(1236,970) 1236.81,970.81 1236.81,971.25 1208.25,999.81 1208.25,1205.38 1173.99,1239.64 1081.84,1239.64 1044.49,1277 973.69,1277 935.49,1238.79 696.14,1238.79 659.51,1202.16 642.2,1202.16 631.16,1213.2 631.16,1305.72 620.62,1316.26 C295.1@591.97,1316.26 ; v1(1287,967.17) 1395.71,967.17 1403.38,974.84 1418.99,974.84 1430.03,963.8 1430.03,870.38 1407.85,848.2 1321.96,848.2 IC101.10 ; C295.1@590.39,1316.26 C295.1 C295.1@591.97,1316.26 ; C295.1@590.39,1316.26 C295.1@591.97,1316.26
  Bot w6: v1(1236,970) 1284.17,970 v1(1287,967.17)
CAN_MOD: IC97.8 IC101.40 | length 235.5
  Top w6: v1(1136.73,518) IC97.8@1231.03,518 ; IC101.40 1144.65,637.52 1144.65,616.35 1157,604 v1(1157,594)
  Bot w6: v1(1136.73,518) 1157,538.27 v1(1157,594)
CAN_MOD2: IC101.30 R420.2 | length 827.1
  Top w6: v1(957,633) 957,629.45 993.45,593 1114,593 v1(1119,588) ; v1(987,797) 997.02,786.98 IC101.30 ; v1(1113,505) 1127,491 1269.85,491 1290,470.85 R420.2
  Bot w6: v1@951.69,640 931.27,640 926,645.27 926,781.73 931.27,787 974,787 984,797 v1(987,797) ; v1(1113,505) 1117.89,509.89 1117.89,525.8 1121.84,529.76 1121.84,545.8 1119,548.65 v1(1119,588)
CAN_RX: IC101.45 R416.2 | length 210.5
  Top w6: R416.2 1092.35,573.84 1106.35,573.84 1117.04,563.16 1190.8,563.16 1237.31,609.67 IC101.45
CAN_TX: IC97.1 IC101.46 | length 313.6
  Top w6: IC97.1 1063.45,514.45 v1(1068,519) ; v1(1103,538) 1182.62,538 1257,612.38 IC101.46
  Bot w6: v1(1068,519) 1084,519 1088,523 v1(1103,538)
CAN_USB_N: IC101.32 TP45.1 | length 102.3
  Top w6: v1(1005,760) 1017.39,747.61 IC101.32
  Bot w6: TP45.1 998,753 v1(1005,760)
CAN_USB_P: IC101.33 TP46.1 | length 122.7
  Top w6: v1(1001,725.45) 1003.48,727.93 IC101.33
  Bot w6: TP46.1 1001,715 v1(1001,725.45)
CANH: D121.1 IC97.7 J105.2 | length 467.2
  Top w6: J105.2 991.73,270.68 1145.7,424.65 1145.7,439.21 1160.06,453.57 v1@1160.06,448.33 ; v1(1160.06,446.65) v1@1160.06,448.33 ; IC97.7@1218.67,455.64 IC97.7 1176.18,464.45 v1@1160.06,448.33
  Bot w6: v1(1160.06,446.65) 1160.06,476.85 D121.1
CANL: D121.2 IC97.6 J105.3 | length 351.6
  Top w6: J105.3 1091.73,342 v1(1179.18,429.45) 1182.88,429.45 1189.07,423.26 1218.67,423.26 IC97.6
  Bot w6: D121.2 1179.18,404.06 v1(1179.18,429.45)
GND: C282.1 C283.1 C284.1 C285.1 C286.1 C287.1 C288.2 C289.1 C290.1 C291.1 C292.1 C293.1 C295.2 C296.2 D120.2 D121.3 D123.2 IC97.2 IC98.2 IC99.3 IC100.1 IC100.2 IC100.3 IC100.4 IC100.7 IC101.8 IC101.23 IC101.35 IC101.47 IC101.49 IC102.1 IC102.10 IC102.19 IC103.4 J105.4 JP10.3 JP10.5 JP10.9 LD32.1 LD33.1 R419.1 R421.1 R424.1 R426.1 R428.1 R436.2 R437.1 TP48.1 | length 2803.5
  Top w6: v1(85.18,840.45) 85.18,844.15 82.14,847.19 82.14,947.63 87.25,952.74 87.25,965.2 C293.1 105.66,983.61 130.82,983.61 LD33.1 ; v1(135.18,811.45) 135.18,787.26 202.95,719.49 IC103.4 v1(202.95,636.22) 172.44,636.22 R436.2 ; D123.2 411.3,1344.45 v1(439.18,1344.45) ; R437.1 591.18,1353.27 591.68,1353.76 v1(620.18,1353.76) ; C296.2 609.46,1290.76 v1(612.18,1290.76) ; C288.2 657.9,1270.45 v1(684.18,1270.45) ; IC102.1 701.98,1136.03 v1@701.98,1091 ; v1(726.18,1315.45) 726.77,1316.04 726.77,1363.58 IC102.19 ; v1(757,969.25) 759,971.25 JP10.9 ; IC98.2@836.61,641.73 837.18,641.16 v1(837.18,600.45) ; v1(854.33,677.17) 883.86,706.69 C283.1@883.86,708.66 ; v1(858,968) 859,969 JP10.5 ; v1@880.36,426.83 848.85,426.83 852.5,427 v1(884,427) 884.18,427.18 R419.1@884.18,459.38 ; R421.1 954.08,365.5 C284.1 963.93,356.94 963.93,344.5 973.54,334.88 v1(973.54,331.18) ; v1(909,967.17) JP10.3 ; v1(931.18,1183.45) 931.63,1183 931.63,1136.28 IC102.10 ; R426.1 977.18,1104.94 977.18,1108 v1(1000,1108) ; v1(1005.18,1349.45) 1005.18,1363.95 1010.18,1368.95 R428.1@1009.68,1369.45 ; C289.1 1021.8,688.56 IC101.35 1078.29,688.56 1166.87,777.14 v1(1188.1,777.14) ; IC97.2 1015.88,465.45 v1(1063.18,465.45) ; IC100.7 1100.98,1041.97 v1(1103.83,1039.12) ; v1(1071,1389) 1071,1388 1078.72,1380.28 C285.1 ; C286.1 1099.52,945.05 IC101.23 1099.52,882 1188.1,793.42 v1(1188.1,777.14) ; IC99.3 1111.28,1302.38 v1(1111.54,1302.64) ; v1(1161,1207) 1161,1198.53 C291.1 ; C292.1 1276.69,606.11 IC101.47 1276.69,672.03 1188.1,760.61 v1(1188.1,777.14) ; IC100.1 1323.92,1016.38 1327,1019.46 1327,1042 1327,1068 ; IC100.2 v1(1326.97,1041.97) ; IC100.3 1326.56,1067.56 1327,1068 ; IC100.4 1322.4,1093.15 1327,1088.54 1327,1068 ; IC101.8 1279.67,806.67 1250.14,777.14 v1(1231.41,777.14) v1(1188.1,777.14) ; LD32.1 1359,411 v1(1360,412) ; C290.1 1424.77,827 v1(1425,826.77) ; v1(1439.79,320.9) 1443.5,324.61 R424.1 ; v1(1441,457) 1443.72,454.28 C287.1
  Bot w6: v1(85.18,840.45) 86.73,838.9 107.73,838.9 v1(135.18,811.45) ; v1(884,427) 884,474.06 886,476.06 884.18,477.88 D120.2 ; v1(1063.18,465.45) 1063.18,461.74 1068.94,455.98 1068.94,448.26 1077.75,439.45 D121.3 ; v1(1410.19,519) 1412.19,517 TP48.1
  other v1: 1101.49,690.53 1144.8,690.53 1188.1,690.53 1231.41,690.53 1274.72,690.53 1101.49,733.83 1144.8,733.83 1188.1,733.83 1231.41,733.83 1274.72,733.83 1101.49,777.14 1144.8,777.14 1274.72,777.14 1101.49,820.45 1144.8,820.45 1188.1,820.45 1231.41,820.45 1274.72,820.45 1101.49,863.76 1144.8,863.76 1188.1,863.76 1231.41,863.76 1274.72,863.76 704,1089.16
LED: IC101.2 R427.1 | length 196.6
  Top w6: IC101.2 1356.44,688.56 1365,680 v1(1365,615) ; R427.1 1366,537.5 v1(1366,565)
  Bot w6: v1(1365,615) 1365.6,614.4 1366,614 v1(1366,565)
NetC281_1: C281.1 IC98.4 | length 102.3
  Top w6: C281.1 746.46,574.41 752.02,568.84 783.04,568.84 802.78,549.11 IC98.4@802.78,539.27
NetC281_2: C281.2 IC98.3 L15.1 | length 189.2
  Top w6: L15.1 722.64,633.66 C281.2 757.5,627.95 771.28,641.73 IC98.3@799.21,641.73
NetC282_2: C282.2 D119.1 IC98.1 R415.2 | length 372.1
  Top w6: D119.1 760.16,527.16 773,527.16 ; v1@773,545 773,527.16 ; v1(773,588) 775,590 820.98,590 829.38,581.61 859.61,581.61 877.58,599.58 IC98.1 ; C282.2 783.5,462.01 R415.2 782.95,502.54 782.95,517.21 773,527.16 ; IC98.1@869.76,637.47 IC98.1@874.02,641.73
  Bot w6: v1(773,550) v1(773,588)
NetC294_1: C294.1 IC103.1 R438.1 | length 422.6
  Top w6: R438.1 54.33,699.41 IC103.1 61.76,709.6 61.76,781.65 122.56,842.45 137.06,842.45 173.76,879.15 173.76,939.25 201.69,967.17 207.33,967.17 C294.1
NetC294_2: C294.2 D122.2 D123.1 | length 503.8
  Top w6: C294.2 225.74,1021.01 225.74,1148.47 318.29,1241.03 405.12,1241.03 411.18,1247.09 D123.1 411.18,1262.05 438.58,1289.45 447.6,1289.45 484.02,1325.87 484.02,1330.56 486.07,1330.56 492.13,1336.61 D122.2
NetC296_1: C296.1 D122.1 R433.1 | length 109.9
  Top w6: D122.1 518.18,1254.33 535.46,1237.05 C296.1 C296.1@588.58,1239.64
NetIC97_4: IC97.4 R416.1 | length 273.5
  Top w6: IC97.4 1033.58,364.45 1094.02,424.89 1094.02,519.62 1067.8,545.84 1054.51,545.84 1049.5,550.86 R416.1
NetIC97_5: IC97.5 R420.1 | length 65.4
  Top w6: IC97.5 1234.53,371.5 R420.1
NetIC98_5: IC98.5 R415.1 R419.2 | length 101.2
  Top w6: IC98.5 840.18,482.32 R415.1 878.5,482 R419.2@884,487.5
NetIC98_6: IC98.6 R418.1 | length 56
  Top w6: IC98.6@877.58,539.27 879.85,541.53 920.76,541.53 R418.1
NetIC102_3: IC102.3 IC102.5 IC102.7 IC102.9 RL8.A1 | length 886.3
  Top w6: RL8.A1 351.13,1108.72 622.79,1108.72 657.34,1143.26 657.34,1183.02 691.32,1217 734.2,1217 745.18,1206.01 745.18,1187.45 752.95,1179.68 ; IC102.3 752.95,1179.68 ; IC102.5 806.18,1137.87 806.18,1179.68 ; IC102.7 854.5,1136.63 854.5,1174.35 849.18,1179.68 ; IC102.9 900.64,1141.68 900.64,1167.21 888.17,1179.68 849.18,1179.68 ; 752.95,1179.68 806.18,1179.68 ; 806.18,1179.68 849.18,1179.68
NetIC102_12: IC102.12 IC102.14 IC102.16 IC102.18 RL8.A2 | length 836
  Top w6: v1(650,1221) 652.28,1221 654.28,1219 657.85,1219 689.65,1250.79 865.11,1250.79 872.92,1258.61 886.59,1258.61 887.56,1257.64 905.8,1257.64 921.83,1273.67 921.83,1296.78 906.5,1312.12 ; IC102.18 752.95,1311.03 769.38,1294.61 803.34,1294.61 ; IC102.16 803.34,1363.38 803.34,1294.61 ; IC102.14 861.87,1357.62 861.87,1301.29 ; IC102.12 906.5,1312.12 ; 803.34,1294.61 807.34,1290.61 851.18,1290.61 861.87,1301.29 ; 861.87,1301.29 890.59,1301.29 892.4,1303.1 893.48,1303.1 902.5,1312.12 906.5,1312.12
  Bot w6: RL8.A2 602.76,1161.32 650,1208.56 v1(650,1221)
NetIC103_2: IC103.2 R432.2 R438.2 | length 478.8
  Top w6: R438.2 99.76,642.28 99.76,697.59 IC103.2 111.76,709.6 111.76,814.68 127.53,830.45 194.18,830.45 v1(235.18,871.45)
  Bot w6: v1(235.18,871.45) 287.45,923.72 287.45,964.61 R432.2
NetIC103_3: IC103.3 R435.2 R436.1 | length 181.3
  Top w6: R435.2 61.02,583.66 80.66,603.3 103.3,603.3 133.07,633.07 R436.1 141.49,642.28 141.49,670.62 152.95,682.09 IC103.3
NetJ105_6: J105.6 R423.1 R424.2 | length 212
  Top w6: J105.6 1391.73,331.24 R424.2 1444.5,384.01 R423.1
NetJ106_2: J106.2 RL8.14 | length 233
  Bot w60: RL8.14 302.76,263.45 327.76,238.45 J106.2
NetJ106_4: J106.4 RL8.12 | length 271.8
  Bot w60: RL8.12 606.34,453.5 606.34,349.56 J106.4
NetLD32_2: LD32.2 R427.2 | length 47.8
  Top w6: LD32.2 1359,493.5 R427.2
NetLD33_2: LD33.2 R429.2 | length 54.2
  Top w6: LD33.2 172.98,1090.72 172.98,1091.53 181.39,1099.94 R429.2
NetR417_1: R417.1 R418.2 R421.2 | length 152.3
  Top w6: R421.2@916,401.5 928.5,401.5 932,405 932,461.42 944.09,461.42 953.94,471.26 945.52,479.68 945.52,497.39 929.97,512.94 R418.2
NetR431_2: R431.2 R432.1 | length 137.2
  Bot w6: R432.1 421.26,971.46 459.69,933.02 459.69,903.5 479.33,883.86 R431.2
NetR434_2: R434.2 R435.1 | length 121.4
  Top w6: R434.2 R435.1
NTC_ANA_IN: C287.2 IC101.14 R423.2 | length 854.9
  Top w6: IC101.14 1275,912.69 1275,952.53 1268.16,959.37 1268.16,974.98 1279.2,986.02 1397.59,986.02 1398.41,986.84 1423.96,986.84 1443.84,966.96 1443.84,818.97 1446.84,815.97 1446.84,676.81 1433.16,663.13 1433.16,641.2 1434.84,639.51 1434.84,500.84 1408.28,474.28 C287.2 ; R423.2 C287.2@1407.5,429
P3V3: C286.2 C289.2 C290.2 C291.2 C292.2 IC99.2 IC100.8 IC101.9 IC101.24 IC101.36 IC101.48 JP10.1 R422.2 R425.2 R430.1 TP47.1 | length 2466.9
  Top w6: IC101.36 1054.24,660.02 1038.65,644.43 C289.2 998.87,658.65 997.17,658.65 991.9,663.93 991.9,665.63 968.16,689.37 968.16,772.22 956.16,784.22 956.16,796.06 935.04,817.17 935.04,938.04 959,962 JP10.1 ; IC101.24 1058,911 C286.2 1058,1016.2 IC100.8 974.39,1016.38 JP10.1 ; v1(1173,1121) 1175.05,1123.05 C291.2 1172.95,1149.05 1136.73,1185.27 R425.2 R422.2 1078.42,1185.27 1068,1195.69 1068,1202.57 1032.98,1237.6 IC99.2 1017.28,1234.16 1017.28,1120.36 1018.84,1118.8 1018.84,1100.2 1007.8,1089.16 983.16,1089.16 959,1065 JP10.1 ; v1(1240,1123) 1243.85,1119.15 1243.85,1007.59 1252.92,998.52 1393.12,998.52 1393.44,998.84 1428.93,998.84 1458.84,968.93 1458.84,655.84 v1(1452,649) ; IC101.48 1312.53,643.28 1314.09,641.73 C292.2 1322.07,596.16 1393.16,596.16 v1(1404,607) 1404,765.65 1411,772.65 1411,779.75 R430.1 1366.28,824.46 C290.2 1322.61,827 IC101.9
  Bot w6: v1(1173,1121) 1175,1123 v1(1240,1123) ; v1(1404,607) 1444.79,607 TP47.1 1452,602.21 v1(1452,649)
P5V0: C283.2 C284.2 C285.2 C288.1 C293.2 IC97.3 IC99.1 IC102.20 IC103.8 J105.5 L15.2 R417.2 R429.1 | length 4512.6
  Top w6: 673.91,1364.17 IC102.20 ; R417.2 C284.2 958.79,405.64 1006.07,405.64 IC97.3 1023.69,423.26 1047.64,423.26 1082.02,457.64 1082.02,473.25 1062.79,492.49 981.79,492.49 966.18,508.1
  Top w20: IC103.8 52.95,1024.82 155.49,1127.36 172.59,1127.36 R429.1 207.88,1162.65 207.88,1179.75 336.58,1308.45 439.73,1308.45 465.02,1333.74 465.02,1365.21 489.42,1389.61 627.02,1389.61 657.18,1359.45 ; 673.91,1364.17 661.91,1364.17 657.18,1359.45 ; v2(724,1193) 696.19,1193 695.19,1194 676.34,1175.15 676.34,876.06 737.41,814.98 763.51,814.98 812.8,765.7 L15.2 850.69,738.19 C283.2 913.16,770.5 913.16,766.41 923.19,756.38 923.19,603.9 968.37,558.72 968.37,510.29 966.18,508.1 ; v2@897.18,1278.45 v2(901.02,1282.29) 896.51,1282.29 891.82,1277.61 865.05,1277.61 859.05,1271.61 v2(732.02,1271.61) 698.46,1305.16 C288.1 657.18,1359.45 ; v2@965.39,1322.66 v2(964.18,1323.87) 982.36,1323.87 993.83,1312.4 IC99.1 1043.28,1334.96 ; C285.2 1043.28,1334.96 ; J105.5 1291.73,171.27 1335,128 1441,128 1478.19,165.19 1478.19,983.81 1127.04,1334.96 1043.28,1334.96
  Bot w20: v2(724,1193) 725.18,1193 732.02,1199.84 v2(732.02,1271.61) ; v2(901.02,1282.29) 929.88,1282.29 933.73,1278.45 964.18,1308.9 v2(964.18,1323.87)
P12V0: D119.2 D120.1 J105.1 | length 464.2
  Top w6: D119.2 738.19,417.29 769.43,386.05 782.05,386.05 891.73,276.38 J105.1
  Bot w20: J105.1 891.73,316.14 D120.1
REL1: IC101.20 IC102.2 IC102.4 IC102.6 IC102.8 R426.2 | length 1097.7
  Top w6: IC102.2 733.22,1129.97 733.22,1104.44 745.22,1092.45 780.18,1092.45 ; IC102.4 780.18,1134.19 780.18,1092.45 ; IC102.6 831.18,1134.37 831.18,1092.45 ; IC102.8 879.18,1134.1 879.18,1092.45 ; IC101.20 1158.57,965.55 1196.25,1003.22 1196.25,1200.41 1169.02,1227.64 1076.87,1227.64 1045.12,1259.39 996.33,1259.39 971.18,1234.25 R426.2 970.39,1147.95 949.98,1127.53 949.98,1102.6 940.17,1092.8 879.53,1092.8 879.18,1092.45 ; 780.18,1092.45 831.18,1092.45 ; 831.18,1092.45 879.18,1092.45
REL2: IC101.19 IC102.11 IC102.13 IC102.15 IC102.17 R428.2 | length 1132.1
  Top w6: v1(777.18,1313.45) 777.86,1314.13 777.86,1363.49 IC102.17 ; v1(828.18,1309.45) 828.95,1310.22 828.95,1363.4 IC102.15 ; IC102.13 880.9,1324 886.18,1318.72 v1(886.18,1322.45) ; R428.2@972.68,1369.45 967.4,1364.17 IC102.11 IC102.11 932.13,1313.5 v1(932.18,1313.45) 956.63,1289 1051.08,1289 1088.44,1251.64 1181.33,1251.64 1221,1211.97 1221,1013.47 1254.84,979.62 1254.84,962.2 1243.8,951.16 1196.39,951.16 1178.26,933.03 IC101.19
  Bot w6: v1@782.18,1318.45 v1(777.18,1313.45) 779.18,1311.45 826.18,1311.45 828.18,1313.45 830.18,1311.45 879.18,1311.45 886.18,1318.45 v1(886.18,1322.45) 923.18,1322.45 v1(932.18,1313.45)
RESETn: IC101.7 JP10.10 R430.2 | length 1223.8
  Top w6: JP10.10 759,833.98 771.38,833.98 792.37,813 897.52,813 932.16,778.37 932.16,774.28 944.16,762.28 944.16,657.4 949.72,651.84 964.8,651.84 979.9,636.75 979.9,623.52 998.42,605 1093.43,605 1095.27,606.84 1126.8,606.84 1138.16,595.49 1138.16,586.2 1149.2,575.16 1164.8,575.16 1182.65,593 v1(1194,593) ; v1(1228.67,557.41) 1233.41,557.41 1247,571 1249.84,573.84 1346.76,573.84 1356.76,583.84 1407.49,583.84 1422.84,599.2 1422.84,634.54 1421.16,636.22 1421.16,756.16 v1(1428,763) ; IC101.7 1364.44,786.98 R430.2 1365.6,786.96 1380,772.56 v1(1380,764)
  Bot w6: v1(1194,593) 1228.67,558.33 v1(1228.67,557.41) ; v1(1380,764) 1427,764 v1(1428,763)
Rx: IC101.13 TP44.1 | length 169.3
  Top w6: IC101.13 1361,911 1406,956 v1(1411.19,956)
  Bot w6: v1(1411.19,956) TP44.1
SCL1: IC100.6 IC101.21 R425.1 | length 327.4
  Top w6: IC100.6 1101.56,1067.56 v1(1101.56,1067.44) ; R425.1 1135.32,1091.31 1142.77,1083.85 v1(1142.77,1066.52) 1138.89,1062.64 IC101.21
  Bot w6: v1(1101.56,1067.44) 1102.48,1066.52 v1(1142.77,1066.52)
SDA1: IC100.5 IC101.22 R422.1 | length 290.9
  Top w6: IC100.5 1102.5,1093.15 1122.67,1072.98 1122.67,914.46 IC101.22 ; 1098,1094.15 1098.32,1094.46 R422.1
SWCLK: IC101.37 JP10.4 | length 382.5
  Top w6: JP10.4 909,826.24 944.16,791.09 944.16,779.25 956.16,767.25 956.16,677.46 991.9,641.72 991.9,628.49 997.17,623.22 1050.91,623.22 1070.98,643.28 IC101.37
SWDIO: IC101.34 JP10.2 | length 247.5
  Top w6: JP10.2 959,810.18 968.16,801.03 968.16,789.2 980.16,777.2 980.16,719.64 993.2,706.61 1052.61,706.61 IC101.34
Tx: IC101.12 TP43.1 | length 130.8
  Top w6: IC101.12 1395.59,885.41 1406,875 v1(1408,875)
  Bot w6: v1(1408,875) 1443.45,875 TP43.1
UMEAS1: J106.3 R431.1 RL8.11 | length 832.9
  Bot w6: RL8.11 344.12,798.45 448.18,798.45 476.95,769.68 R431.1
  Bot w60: RL8.11 476.18,583.66 476.18,282.87 J106.3
UMEAS2: J106.1 R434.1 | length 243.9
  Top w6: R434.1 80.66,429.81 80.66,284.69 J106.1
pads on no net: IC101.1 IC101.3 IC101.4 IC101.5 IC101.6 IC101.11 IC101.15 IC101.16 IC101.17 IC101.18 IC101.25 IC101.26 IC101.27 IC101.28 IC101.29 IC101.31 IC101.38 IC101.39 IC101.41 IC101.42 IC101.43 IC101.44 IC103.5 IC103.6 IC103.7 JP10.6 JP10.7 JP10.8

## Polygon pours and split planes (outlines as drawn)
GND on Bot "Signal Layer 1-No Net 1" (solid, remove dead copper, pour order 0): -1.82,612.45 219.18,612.45 226.18,619.45 226.18,831.45 282.18,887.45 282.18,1021.45 315.18,1054.45 537.18,1054.45 641.18,950.45 641.18,871.45 703.18,809.45 703.18,543.45 736.18,510.45 736.18,418.45 834.18,320.45 834.18,3 831.18,0 1496.06,0 1496.06,997.57 1086.15,1407.48 403.54,1407.48 0,1003.94

## Keep-outs
Bot:
  lines w50: 262.39,819.39 232.18,789.18 232.18,697.68 277.86,652
KeepOutLayer:
  lines w7.87: 0,0 0,1003.94 403.54,1407.48 1082.68,1407.48 1496.06,994.09 1496.06,0 0,0
  lines w39.37: 31.18,509.45 101.18,509.45 118.11,492.52 118.11,414.01 ; 41.18,309.45 41.18,190.75 72.48,159.45 761.18,159.45 791.18,189.45 791.18,299.45 680.18,410.45 680.18,490.45 665.18,505.45 665.18,805.45 641.18,829.45 551.18,829.45 ; 232.18,430.45 232.18,500.45 281.18,549.45 411.65,549.45

## Silkscreen, mask and mechanical layers (free items; w line width, h text height)
TopOverlay:
  text "MEAS" at 31.18,19.45 h47.24
  text "COM" at 451.18,9.45 h47.24
  text "P" at 911.18,9.45 h47.24
  text "H" at 1011.18,9.45 h47.24
  text "L" at 1131.18,9.45 h47.24
  text "G" at 1221.18,9.45 h47.24
  text "NTC" at 1289.37,9.84 h47.24
BottomOverlay:
  text "CAN" at 977,1122 h60
  text "SWITCH" at 1065.67,1032.95 h60
  text "RELAY STM" at 1036.14,951.06 h60
  text "Rx" at 1364.44,948 h60
  text "v1.0" at 967,864 h60
  text "Tx" at 1356.44,837 h60
  text "D-" at 1036,732 h60
  text "D+" at 1039,655 h60
  text "Vcc" at 1382,606.11 h60
  text "GND" at 1379.11,478.17 h60
Mechanical1:
  the board outline again, w3.94

## Text inside footprints (layer, text, board x,y; h text height)
J105: TopOverlay "6" at 1376.73,266.85 h39.37; TopOverlay "4" at 1176.73,266.85 h39.37; TopOverlay "1" at 886.73,266.85 h39.37; TopOverlay "2" at 976.73,266.85 h39.37; TopOverlay "3" at 1076.73,266.85 h39.37; TopOverlay "5" at 1276.73,266.85 h39.37
J106: TopOverlay "1" at 121.06,1.18 h47.24; Mechanical14 "1" at 54.13,300.39 h47.24